# Altium PCB 风扇_V1.4.PcbDoc
Units mm, origin at the board's own origin, x right, y up, seen from the top; angles counter-clockwise.
Board outline 21 x 121 mm, 2 copper layers (Top Layer, Bottom Layer); 63 components, 46 nets, 205 pads, 114 vias.
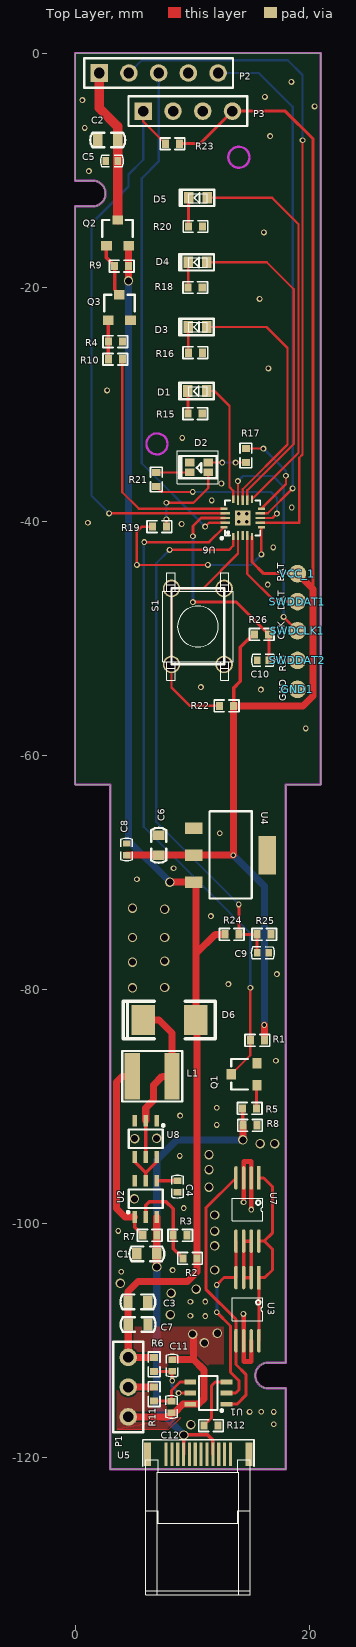
[diagram p0: Top Layer view]
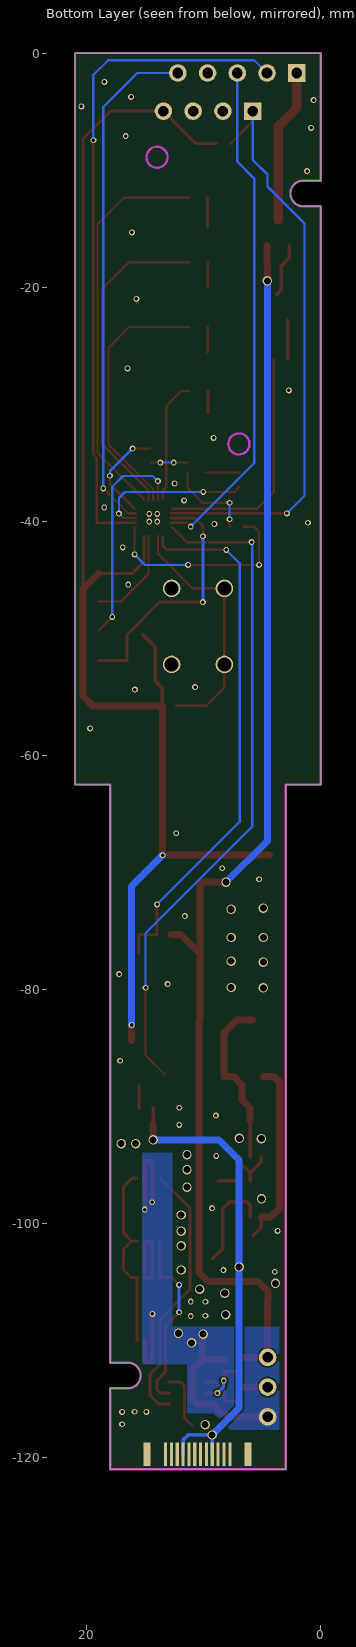
[diagram p1: Bottom Layer view, seen from below]

## Layer stack, top to bottom
Top Layer: signal copper 0.0356
Dielectric: dielectric 0.32, FR-4, Dk 4.8
Bottom Layer: signal copper 0.0356

## Board outline
0,-62.5 0,-13.1 1.5,-13.1 ccw(c1.5,-12) 1.5,-10.9 0,-10.9 0,0 21,0 21,-62.5 18,-62.5 18,-111.9 16.5,-111.9 ccw(c16.5,-113) 16.5,-114.1 18,-114.1 18,-121 3,-121 3,-62.5

## Design rules (kind name [scope] priority, off if disabled: settings)
Clearance [All] p1: gap=0.15
FabricationTestPointUsage TestPointUsage [All] p1: valid=0 allowmultiple=FALSE
FabricationTestpoint Testpoint [(IsPad And (OnTopLayer Or OnBottomLayer))] p1: side=3 testpointundercomponent=TRUE minsize=1.016 maxsize=2.54 preferedsize=1.524 minholesize=0 maxholesize=1.016 preferedholesize=0.813 testpointgrid=0.025 allowsidetop=TRUE allowsidebottom=TRUE usegrid=TRUE gridtolerance=0
PlaneConnect [All] p1: planeconnectstyle=Direct reliefexpansion=0.508 reliefentries=4 reliefconductorwidth=0.254 reliefairgap=0.254
PolygonConnect [All] p1: connectstyle=Direct reliefconductorwidth=0.254 reliefentries=4 polygonreliefangle="90 Angle"
RoutingVias [All] p1: holewidth=0.3 width=0.5 viastyle="Through Hole" minholewidth=0.3 minwidth=0.5 maxholewidth=0.711 maxwidth=1.27
SilkscreenOverComponentPads [All] p1: minsilkscreentomaskgap=0.254
SolderMaskExpansion [All] p1: expansion=0.102
Width [All] p1: maxlimit=1 minlimit=0.15 preferedwidth=0.254
24 further rules are at their usual default settings.

## Components (designator, comment, footprint, x,y, rotation, side; value= is the part's Value field where it differs from the comment)
C1 "47uF" C-0603 6.129,-102.598 r180 top
C2 "22uF" C-0603 2.794,-7.427 r0 top
C3 "47uF" C-0603 5.367,-106.713 r180 top
C4 "4.7uF" C-0402 8.748,-96.853 r270 top
C5 "1uF" C-0402 3.137,-9.225 r0 top
C6 "22uF" C-0603 7.15,-67.691 r270 top
C7 "22uF" C-0603 5.387,-108.646 r180 top
C8 "1uF" C-0402 4.402,-68.039 r270 top
C9 "1uF" C-0402 16.06,-76.881 r180 top
C10 "0.1uF" C-0402 16.06,-51.89 r0 top
C11 "1uF" C-0402 8.293,-112.141 r270 top
C12 "1uF" C-0402 8.242,-115.694 r90 top
D1 "LED0" LED-0603 9.069,-28.2 r0 top
D2 "RGB-GND" 0603*2-LED 9.794,-35.834 r0 top
D3 "LED0" LED-0603 9.094,-22.724 r0 top
D4 "LED0" LED-0603 9.095,-17.196 r0 top
D5 "LED0" LED-0603 9.129,-11.69 r0 top
D6 "SS34" DSMD 10.328,-82.619 r180 top
GND1 "TP" TP-1.5 19.002,-54.369 r90 top
L1 "10uH" L-SMD 6.584,-87.417 r180 top
P1 "Header 3H" HED1X3 4.544,-113.99 r270 top
P2 "Header 5" HDR1X5 2.06,-1.702 r0 top
P3 "Header 4" HDR1X4 5.829,-4.963 r0 top
Q1 "8050" SOT-23 13.343,-87.262 r90 top
Q2 "BM2301" SOT-23 3.635,-14.262 r0 top
Q3 "8050" SOT-23 3.787,-20.637 r0 top
R1 "10K" R-0402 15.448,-84.361 r0 top
R2 "60K" R-0402 9.954,-102.997 r180 top
R3 "10K" R-0402 8.857,-101.023 r0 top
R4 "10K" R-0402 3.564,-24.651 r180 top
R5 "1K" R-0402 14.793,-90.175 r0 top
R6 "330R" R-0402 6.756,-112.177 r90 top
R7 "60mR" R-0402 6.256,-101.021 r0 top
R8 "10K" R-0402 14.816,-91.62 r0 top
R9 "470K" R-0402 3.856,-18.199 r0 top
R10 "4.7K" R-0402 3.564,-26.162 r180 top
R11 "330R" R-0402 6.756,-114.717 r90 top
R12 "2K" R-0402 11.735,-117.279 r180 top
R15 "500R" R-0402 10.14,-30.8 r0 top
R16 "500R" R-0402 10.15,-25.603 r0 top
R17 "500R" R-0402 14.597,-34.262 r270 top
R18 "500R" R-0402 10.14,-20.03 r0 top
R19 "500R" R-0402 7.076,-40.462 r0 top
R20 "500R" R-0402 10.163,-14.821 r0 top
R21 "500R" R-0402 6.939,-36.563 r90 top
R22 "47K" R-0402 12.824,-55.783 r0 top
R23 "47K" R-0402 8.202,-7.747 r0 top
R24 "1M" R-0402 13.264,-75.301 r0 top
R25 "1M" R-0402 16.035,-75.301 r0 top
R26 "47K" R-0402 16.076,-49.677 r180 top
S1 "SW-PB" SW-6*6*4.3 10.493,-48.989 r90 top
SWDCLK1 "TP" TP-1.5 19.002,-49.362 r90 top
SWDDAT1 "TP" TP-1.5 19.002,-46.868 r90 top
SWDDAT2 "TP" TP-1.5 19.002,-51.897 r90 top
U1 "HY2120-CB" SOT-23-6L 11.384,-114.498 r90 top
U2 "HM4033" SOT-23-6L 6.04,-97.902 r0 top
U3 "8205A" TSSOP8 15.7,-104.637 r270 top
U4 "AMS1117-3.3V" SOT-223 13.289,-68.542 r270 top
U5 "USB Type-C" "USB-type C" 10.523,-119.72 r0 top
U6 "N76E003AQ20" "QFN-20 0.4mm" 14.321,-39.726 r0 top
U7 "8205A" TSSOP8 15.7,-96.118 r270 top
U8 "HM8205-6" SOT-23-6L 6.04,-92.776 r180 top
VCC_1 "TP" TP-1.5 19.002,-44.486 r90 top

## Footprints (in the part's own frame and the unit in brackets; to place one, negate y for a bottom-side part, rotate by r counter-clockwise, add the part's x,y. Pads: shape width x height; smd on the part's side, far side on the other; paste and mask are expansions set on the pad)
0603*2-LED [mm]
  rect 0.8x0.65 smd: 1(1.6,0.85) 2(1.6,0) 3(0,0) 4(0,0.85)
  silkscreen extent -0.9,-0.5 2.3,1.4
C-0402 [mm]
  rect 0.55x0.65 smd: 1(-0.5,0) 2(0.5,0)
  Top Layer pour cut-out: -0.228,0.419 -0.228,-0.419 0.229,-0.419 0.216,-0.406 0.216,0.419
  silkscreen extent -0.96,-0.5 0.99,0.5
C-0603 [mm]
  rect 0.8x1 smd: 1(-0.85,0) 2(0.85,0)
  silkscreen extent -1.49,-0.63 1.49,0.63
DSMD [mm]
  rect 2x2.54 smd: 1(0,0) 2(4.5,0)
  silkscreen extent -1.65,-1.6 6.22,1.6
HDR1X4 [mm] "Connector; Header; 4 Position"
  rect 1.5x1.5 hole 0.9: 1(0,0)
  round 1.5 hole 0.9: 2(2.54,0) 3(5.08,0) 4(7.62,0)
  silkscreen extent -1.27,-1.27 8.89,1.27
HDR1X5 [mm] "Connector; Header; 5 Position"
  rect 1.5x1.5 hole 0.9: 1(0,0)
  round 1.5 hole 0.9: 2(2.54,0) 3(5.08,0) 4(7.62,0) 5(10.16,0)
  silkscreen extent -1.27,-1.27 11.43,1.27
HED1X3 [mm]
  round 1.5 hole 0.9: 1(-2.54,0) 2(0,0) 3(2.54,0)
  silkscreen extent -3.87,-1.27 3.87,1.27
L-SMD [mm]
  rect 1.3x4 smd: 1(1.692,0.016) 2(-1.708,0.016)
  silkscreen extent -2.57,-2.14 2.56,2.17
LED-0603 [mm]
  rect 0.8x1 smd: 1(2.17,-0.68) 2(0.57,-0.68)
  silkscreen extent -0.19,-1.38 2.77,0.02
"QFN-20 0.4mm" [mm]
  rect 0.2x0.6 smd: 1(-0.8,-1.6) 5(0.8,-1.6) 11(0.8,1.6) 15(-0.8,1.6)
  rect 0.2x0.8 smd: 2(-0.4,-1.5) 3(0,-1.5) 4(0.4,-1.5) 12(0.4,1.5) 13(0,1.5) 14(-0.4,1.5)
  rect 0.6x0.2 smd: 6(1.6,-0.8) 10(1.6,0.8) 16(-1.6,0.8) 20(-1.6,-0.8)
  rect 0.8x0.2 smd: 7(1.5,-0.4) 8(1.5,0) 9(1.5,0.4) 17(-1.5,0.4) 18(-1.5,0) 19(-1.5,-0.4)
  rect 1.3x1.3 smd: 21(0,0)
  silkscreen extent -1.88,-1.82 1.5,1.5
R-0402 [mm]
  rect 0.6x0.7 smd: 1(-0.473,0) 2(0.727,0)
  Top Layer pour cut-out: -0.178,0.445 -0.178,-0.445 0.432,-0.445 0.432,0.445
  silkscreen extent -0.92,-0.5 1.18,0.5
SOT-23 [mm]
  rect 0.9x0.8 smd: 1(-0.95,-2.2) 2(0.95,-2.2) 3(0,0)
  silkscreen extent -1.3,-1.44 1.3,0
SOT-23-6L [mm]
  rect 0.4x1 smd: 1(-0.95,-1.55) 2(0,-1.55) 3(0.95,-1.55) 4(0.95,1.55) 5(0,1.55) 6(-0.95,1.55)
  silkscreen extent -1.6,-1.24 1.45,0.8
SOT-223 [mm]
  rect 1x1.5 smd: 1(-2.3,-3.15) 2(0,-3.15) 3(2.3,-3.15)
  rect 3.3x1.5 smd: ""(0,3.15)
  silkscreen extent -3.76,-1.8 3.7,1.8
SW-6*6*4.3 [mm]
  round 1.5 hole 1.2: 1(-3.25,2.25) 1(3.25,2.25) 2(-3.25,-2.25) 2(3.25,-2.25)
  silkscreen extent -3.25,-2.25 3.25,2.25
TP-1.5 [mm]
  round 1.5 smd: 1(0,0)
TSSOP8 [mm]
  rect 2x0.3 smd: 1(0,0)
  oval 2x0.3 smd: 2(0,-0.65) 3(0,-1.3) 4(0,-1.95) 5(5.4,-1.95) 6(5.4,-1.3) 7(5.4,-0.65) 8(5.4,0)
  silkscreen extent 1.74,-2.28 3.66,0.33
"USB-type C" [mm]
  rect 0.27x2 smd: 1(-2.75,0) 2(-2.25,0) 3(-1.75,0) 4(-1.25,0) 5(-0.75,0) 6(-0.25,0) 7(0.25,0) 8(0.75,0) 9(1.25,0) 10(1.75,0) 11(2.25,0) 12(2.75,0)
  rect 0.27x2 smd far side: 13(2.75,0) 14(2.25,0) 15(1.75,0) 16(1.25,0) 17(0.75,0) 18(0.25,0) 19(-0.25,0) 20(-0.75,0) 21(-1.25,0) 22(-1.75,0) 23(-2.25,0) 24(-2.75,0)
  rect 0.6x2 smd: ""(-4.32,0) ""(4.32,0)
  rect 0.6x2 smd far side: ""(-4.32,0) ""(4.32,0)
  silkscreen extent -4.73,-1.03 4.76,1.22

## Part data
C1 C2 C3 C4 C5 C6 C7 C8 C9 C10 C11 C12: library part Cap, "Capacitor"
D1 D3 D4 D5: "Typical INFRARED GaAs LED"
D6: library part "Diode 10TQ035", "Schottky Rectifier"
L1: library part Inductor, "Inductor"
P1: "Header, 3-Pin, Right Angle"
P2: "Header, 5-Pin"
P3: "Header, 4-Pin"
Q1 Q3: library part NPN, "NPN Bipolar Transistor"
Q2: library part PMOS-2, "P-Channel Power MOSFET"
R1 R2 R3 R4 R5 R6 R7 R8 R9 R10 R11 R12 R15 R16 R17 R18 R19 R20 R21 R22 R23 R24 R25 R26: library part Res1, "Resistor"
S1: "Switch"
U1: library part HY2120
U4: library part AMS1117

## Via types
v1: diameter 0.5, hole 0.3, Top Layer to Bottom Layer, tented both sides, 81 vias
v2: diameter 0.8, hole 0.6, Top Layer to Bottom Layer, tented both sides, 33 vias

## Nets (pads, with @x,y where several pads share a name; then routed paths per layer and width w, separated by ;. In a path a pad name is that pad's centre, name@x,y a point inside that pad or via, vN(x,y) a via of type N, cw(c..) or ccw(c..) an arc to the next point about the centre after c; other vN are vias at no path point)
5V: C1.1 R5.1 R7.2 R8.1 U2.3 U5.4 U5.9 U5.16 U5.21 | length 50.7
  Top Layer w0.3: U5.4 U5.4@9.273,-119.707 ; U5.4@9.286,-119.707 v2(9.286,-118.08) 11.34,-118.08 11.773,-118.514 U5.9 ; R8.1@14.32,-91.597 R5.1
  Top Layer w0.6: v2(6.98,-103.73) U2.3@6.98,-99.462 ; v2(14.33,-92.87) R8.1@14.33,-91.608
  Bottom Layer w0.3: U5.21 v2@9.273,-118.093 ; v2(9.286,-118.08) 11.34,-118.08 11.773,-118.514 U5.16
  Bottom Layer w0.6: v2(9.286,-118.08) 6.98,-115.774 v2(6.98,-103.73) 6.98,-94.58 8.69,-92.87 v2(14.33,-92.87) v2@14.13,-92.87
BAT: C3.2 C7.2 D6.1 P1.1 Q2.2 R2.1 R6.2 R9.2 R24.1 U4.3 | length 108.6
  Top Layer w0.6: C3.2 4.517,-105.823 5.38,-104.96 9.62,-104.96 10.427,-104.153 R2.1 10.427,-82.718 D6.1 10.328,-76.952 ; C7.2 C3.2@4.537,-106.733 ; C7.2@4.544,-108.653 P1.1 R6.2 ; v2(4.57,-19.46) R9.2@4.57,-18.212 ; R9.2 Q2.2@4.583,-16.464 ; v2(8.098,-70.842) U4.3 ; U4.3@10.328,-71.03 10.328,-76.952 ; R24.1 11.979,-75.301 10.328,-76.952
  Bottom Layer w0.6: v2(4.57,-19.46) 4.57,-67.314 v2(8.098,-70.842)
BAT-: C11.1 C12.1 P1.3 U1.6 U3.6 U3.7 U7.2 U7.3 | length 30.8
  Top Layer w0.4: v1@14.4,-107.75 U3.6 14.4,-111.81 15.05,-111.81 U3.7 15.05,-111.3 ; v1(14.4,-98.19) U7.3 14.4,-94.71 15.05,-94.71 U7.2 v1(15.05,-98.82)
  Top Layer w0.6: P1.3 7.906,-116.53 C12.1 8.479,-116.194 9.225,-115.448 U1.6 10.562,-115.448 11,-115.01 11,-112.51 10.131,-111.641 C11.1 ; 10.11,-111.68 v2@10.11,-109.49
  other v1: 14.39,-107.74
  other v2: 11.04,-110.21 10.05,-109.46 12.16,-109.39
BAT_ADC: C9.2 R24.2 R25.1 U6.1 | length 45.7
  Top Layer w0.2: v1(8.08,-42.45) 13.16,-42.45 13.521,-42.089 U6.1
  Top Layer w0.254: R24.2 v1@13.991,-72.741 ; R24.2@13.993,-75.303 15.56,-75.303 C9.2
  Bottom Layer w0.2: v1(8.08,-42.45) 6.94,-43.59 6.94,-65.69 v1(13.99,-72.74)
CLK: SWDCLK1.1 U6.14 | length 18.9
  Top Layer w0.2: U6.14 v1(13.921,-36.581) ; v1(17.82,-48.181) SWDCLK1.1
  Bottom Layer w0.2: v1(13.921,-36.581) 14.361,-36.14 16.91,-36.14 17.82,-37.05 v1(17.82,-48.181)
DAT: SWDDAT1.1 U6.4 | length 8.5
  Top Layer w0.2: U6.4 14.721,-44.511 17.078,-46.868 SWDDAT1.1
DRV: U2.5 U8.4 U8.6 | length 4.2
  Top Layer w0.3: U8.4 5.09,-94.72 6.04,-95.67 ; U2.5 6.04,-95.67 ; U8.6 6.99,-94.72 6.04,-95.67
FB: R2.2 R3.1 U2.2 | length 8.3
  Top Layer w0.3: U2.2 6.04,-98.45 6.35,-98.14 7.77,-98.14 8.384,-98.754 8.384,-102.154 R2.2
GND: C1.2 C2.1 C3.1 C4.2 C5.1 C6.1 C7.1 C8.1 C9.1 C10.1 D2.4 GND1.1 P2.4 P3.2 P3.3 Q1.2 Q3.2 R3.2 R4.1 R8.2 R12.1 R15.2 R16.2 R18.2 R20.2 R25.2 S1.2 U2.6 U3.2 U3.3 U4.1 U5.1 U5.12 U5.13 U5.24 U6.3 U6.21 U7.6 U7.7 U8.1 U8.3 | length 7.5
  Top Layer w0.3: U3.3 U7.6 U7.7 15.05,-103.09 U3.2 U3.3
  other v1: 16.98,-117.17 14.91,-116.11 15.91,-116.1 16.98,-116.11 11.12,-107.92 9.86,-107.89 9.86,-106.7 11.12,-106.69 3.94,-104.14 8.33,-104 3.69,-100.65 9.29,-98.7 8.94,-94.24 12.1,-91.59 8.97,-90.79 12.1,-90.12 17.16,-86.1 13.1,-79.56 17.24,-78.7 11.61,-73.75 5.28,-70.59 8.42,-69.66 12.36,-66.66 19.71,-57.7 15.88,-54.39 10.75,-54.18 16.46,-45.42 16.93,-42.24 9.1,-40.24 1.1,-40.13 13.98,-40.03 14.66,-40.03 13.98,-39.38 14.66,-39.38 18.51,-38.83 11.68,-38.22 12.5,-36.78 9.16,-32.88 2.73,-28.83 16.52,-26.94 15.76,-21 16.14,-15.32 1.18,-10.09 16.67,-7.09 0.83,-6.4 20.46,-4.56 0.62,-4.02 16.22,-3.74 18.49,-2.47
  other v2: 9.89,-117.2 8.14,-107.8 8.21,-105.96 10.35,-105.62 3.87,-105.12 11.93,-103.99 11.93,-101.92 11.93,-100.67 11.93,-99.29 5.07,-97.91 11.44,-96.91 11.44,-95.41 11.44,-94.13 15.82,-93.19 17.06,-93.19 5.09,-92.76 6.97,-92.74 4.91,-79.87 7.66,-79.85 4.91,-77.68 7.66,-77.59 4.91,-75.57 7.66,-75.57 7.66,-73.16 4.91,-73.06
IP-: C2.2 C5.2 P2.1 Q2.3 | length 13.2
  Top Layer w0.8: P2.1 2.06,-4.69 3.635,-6.265 Q2.3
KEY: R22.1 S1.1 U6.2 | length 21.7
  Top Layer w0.2: R22.1 9.823,-55.783 8.243,-54.203 8.243,-52.239 8.243,-45.739 10.95,-45.739 13.921,-42.768 U6.2
KEY_TOP: P3.1 R23.1 U6.17 | length 50.3
  Top Layer w0.2: v1(2.9,-39.33) U6.17@12.816,-39.33 ; P3.1 5.829,-5.848 R23.1
  Bottom Layer w0.2: v1(2.9,-39.33) 1.4,-37.83 1.4,-14.57 4.56,-11.41 4.56,-10.38 5.829,-9.111 P3.1
LED1: D1.1 U6.15 | length 10.6
  Top Layer w0.2: D1.1 11.92,-28.88 13.2,-30.16 13.2,-37.09 13.521,-37.411 U6.15
LED2: D3.1 U6.13 | length 22.2
  Top Layer w0.2: D3.1 16.364,-23.404 18.15,-25.19 18.15,-33.445 14.321,-37.275 U6.13
LED3: D4.1 U6.12 | length 28.1
  Top Layer w0.2: D4.1@11.271,-17.87 16.38,-17.87 18.69,-20.18 18.69,-33.4 14.721,-37.369 U6.12
LED4: D5.1 U6.11 | length 33.9
  Top Layer w0.2: D5.1 16.84,-12.37 19.09,-14.62 19.09,-34.156 U6.11
LED_B: R17.1 U6.10 | length 8.3
  Top Layer w0.2: R17.1 v1(16.09,-33.79) ; U6.10 18.02,-36.826 v1(18.02,-36.12)
  Bottom Layer w0.2: v1(16.09,-33.79) 18.02,-35.72 v1(18.02,-36.12)
LED_G: R19.1 U6.6 | length 17.8
  Top Layer w0.2: R19.1 5.718,-40.462 5.28,-40.9 v1(5.28,-43.74) v1(11.35,-43.74) ; v1@15.921,-42.839 U6.6
  Bottom Layer w0.2: v1@5.21,-43.67 v1(5.28,-43.74) ; v1(11.35,-43.74) 15.02,-43.74 v1(15.92,-42.84)
LED_R: R21.1 U6.8 | length 13.6
  Top Layer w0.2: R21.1 7.403,-37.5 v1(10.05,-37.5) ; U6.8 16.874,-39.726 v1(17.25,-39.35)
  Bottom Layer w0.2: v1(10.05,-37.5) 16.74,-37.5 17.25,-38.01 v1(17.25,-39.35)
M_CW: P2.3 U6.19 | length 43.4
  Top Layer w0.2: v1(11.11,-40.46) 11.444,-40.126 U6.19
  Bottom Layer w0.2: P2.3 7.14,-9.27 5.7,-10.71 5.7,-35.05 v1(11.11,-40.46)
M_FG: P2.2 U6.7 | length 57.5
  Top Layer w0.2: U6.7 19.156,-40.126 19.156,-34.585 19.44,-34.301 v1(19.44,-7.45)
  Bottom Layer w0.2: P2.2 5.692,-0.61 18.17,-0.61 19.44,-1.88 v1(19.44,-7.45)
M_GND: P1.2 R11.2 | length 2.2
  Top Layer w0.6: P1.2 R11.2@6.756,-113.99
M_PWM: P2.5 U6.9 | length 43.7
  Top Layer w0.2: U6.9 16.464,-39.326 v1(18.59,-37.2)
  Bottom Layer w0.2: P2.5 15.691,-1.702 18.534,-4.546 ; v1(18.59,-37.2) 18.59,-4.601
NetC4_1: C4.1 U2.4 | length 1.8
  Top Layer w0.3: U2.4 C4.1@8.746,-96.352
NetC11_2: C11.2 R6.1 U1.5 | length 4.6
  Top Layer w0.254: R6.1 8.284,-112.65 8.284,-113.414 v1(8.3,-113.43) ; v1(8.842,-114.498) U1.5
  Bottom Layer w0.254: v1(8.3,-113.43) 8.3,-113.956 v1(8.842,-114.498)
NetC12_2: C12.2 R11.1 U1.4 | length 4.3
  Top Layer w0.254: R11.1 8.238,-115.19 8.238,-114.272 8.962,-113.548 U1.4
NetD1_2: D1.2 R15.1 | length 1.9
  Top Layer w0.254: R15.1@9.639,-30.773 D1.2
NetD2_1: D2.1 R17.2 | length 3.2
  Top Layer w0.2: D2.1@11.399,-34.989 v1(12.571,-34.989) ; v1(13.711,-34.989) R17.2
  Bottom Layer w0.2: v1(12.571,-34.989) v1(13.711,-34.989)
NetD2_2: D2.2 R19.2 | length 7.5
  Top Layer w0.2: v1(7.8,-39.84) 7.803,-39.843 R19.2 ; v1(7.8,-38.42) 10.12,-38.42 11.394,-37.146 D2.2
  Bottom Layer w0.2: v1(7.8,-39.84) v1(7.8,-38.42)
NetD2_3: D2.3 R21.2 | length 2.9
  Top Layer w0.2: R21.2 D2.3@9.792,-35.836
NetD3_2: D3.2 R16.1 | length 2.2
  Top Layer w0.2: R16.1@9.664,-25.59 D3.2
NetD4_2: D4.2 R18.1 | length 2.2
  Top Layer w0.2: R18.1@9.665,-20.029 D4.2
NetD5_2: D5.2 R20.1 | length 2.4
  Top Layer w0.254: R20.1 D5.2@9.69,-12.379
NetD6_3: D6.2 L1.2 U8.2 U8.5 | length 14.9
  Top Layer w0.3: U8.5 U8.2
  Top Layer w0.6: D6.2 7.179,-82.619 8.292,-83.732 L1.2 7.453,-87.433 6.72,-88.165 6.72,-89.47 6.04,-90.15 U8.2
NetL1_1: L1.1 R7.1 U2.1 | length 16
  Top Layer w0.3: U2.1 5.09,-100.328 R7.1
  Top Layer w0.6: L1.1 4.05,-87.433 3.55,-87.933 3.55,-98.724 4.278,-99.452 U2.1
NetQ1_1: Q1.1 R5.2 | length 1.9
  Top Layer w0.254: R5.2 Q1.1@15.52,-88.234
NetQ2_1: Q2.1 Q3.3 R9.1 | length 4.6
  Top Layer w0.3: Q2.1 2.685,-17.501 R9.1 3.383,-20.233 Q3.3
NetQ3_1: Q3.1 R4.2 R10.2 | length 3.3
  Top Layer w0.3: R10.2 Q3.1
NetR12_2: R12.2 U1.3 | length 5.1
  Top Layer w0.254: R12.2 11.65,-116.637 11.65,-113.88 11.982,-113.548 U1.3
NetU3_1: U3.1 U3.8 U7.1 U7.8 | length 16.5
  Top Layer w0.254: U3.8 U3.1 16.213,-104.637 16.86,-103.99 16.86,-102.21 16.168,-101.518 ; U7.8 16.168,-101.518 ; U7.1 16.118,-96.118 16.85,-96.85 16.85,-100.835 16.168,-101.518
OC: U1.2 U3.4 U7.5 | length 15.9
  Top Layer w0.254: v1(12.11,-107.6) 13.29,-108.78 13.29,-112.72 13.99,-113.42 13.99,-114.23 13.722,-114.498 U1.2 ; v1(12.11,-105.26) 12.733,-104.637 U3.4 U7.5
  Bottom Layer w0.254: v1(12.11,-107.6) v1(12.11,-105.26)
OD: U1.1 U3.5 U7.4 | length 23
  Top Layer w0.254: U1.1 13.832,-115.448 14.59,-114.69 14.59,-112.9 13.75,-112.06 U3.5 13.75,-108.2 11.173,-105.623 11.173,-98.695 U7.4
RST: C10.2 R26.1 SWDDAT2.1 U6.18 | length 21.8
  Top Layer w0.254: v1(10.07,-46.91) 13.781,-46.91 R26.1 ; v1(10.07,-41.29) 10.07,-40.41 10.754,-39.726 U6.18 ; R26.1@16.561,-49.69 C10.2 SWDDAT2.1@18.994,-51.89
  Bottom Layer w0.254: v1(10.07,-46.91) v1(10.07,-41.29)
USB_CHECK: Q1.3 R1.1 U6.20 | length 57.2
  Top Layer w0.2: v1(5.91,-41.79) 11.456,-41.79 U6.20 ; Q1.3 14.975,-85.629 R1.1 v1(14.975,-79.865)
  Bottom Layer w0.2: v1@5.87,-41.99 5.87,-66.11 14.975,-75.215 v1(14.975,-79.865) ; v1@5.91,-41.95 v1(5.91,-41.79)
V_MOTOR: R10.1 U6.16 | length 20.6
  Top Layer w0.2: R10.1 4.037,-37.527 5.436,-38.926 U6.16
VCC_5V: C6.2 C8.2 P3.4 R1.2 R22.2 R23.2 R26.2 U4.2 U6.5 VCC_1.1 | length 122.1
  Top Layer w0.254: R23.2 10.665,-7.747 P3.4 17.963,-4.963 20.32,-7.32 20.32,-45.804 ; U6.5@15.125,-41.326 15.125,-43.48 16.13,-44.486 VCC_1.1
  Top Layer w0.3: R22.2 13.551,-54.249 14.13,-53.67 14.13,-50.78 R26.2@15.233,-49.677
  Top Layer w0.6: C8.2@4.404,-68.542 U4.2 v1(13.522,-68.542) R22.2@13.522,-55.813 ; R22.2 19.487,-55.783 20.32,-54.95 20.32,-45.804 VCC_1.1 ; v1(16.17,-83.05) 16.175,-83.055 R1.2
  Bottom Layer w0.6: v1(13.522,-68.542) 16.17,-71.19 v1(16.17,-83.05)
pads on no net: U4. U5. U5.2 U5.3 U5.5 U5.6 U5.7 U5.8 U5.10 U5.11 U5.14 U5.15 U5.17 U5.18 U5.19 U5.20 U5.22 U5.23

## Polygon pours and split planes (outlines as drawn)
BAT- on Top Layer "Bottom Layer-No Net" (solid, remove dead copper, pour order 1000): 12.7,-108.84 3.55,-108.84 3.55,-117.62 7.78,-117.62 9.18,-116.22 9.19,-116.21 11.42,-116.21 11.42,-112.02 11.44,-112.04 12.7,-112.04 12.7,-108.85
BAT- on Top Layer "Bottom Layer-No Net" (solid, remove dead copper, pour order 1000): 3.59,-117.61 8,-117.61 9.02,-116.59
BAT- on Bottom Layer "Bottom Layer-No Net" (solid, remove dead copper, pour order 1002): 12.7,-93.98 15.24,-93.98 15.24,-112.02 11.55,-112.02 11.45,-112.02 11.42,-112.02 11.42,-116.21 9.17,-116.21 9.17,-116.22 8.14,-117.25 7.77,-117.62 3.55,-117.62 3.55,-108.84 12.7,-108.84 12.7,-93.98

## Keep-outs
Keep-Out Layer:
  circle w0.2: c14,-8.9 r0.9
  circle w0.2: c7,-33.4 r0.9
  lines w0.2: 0,-62.5 3,-62.5 3,-121 18,-121 18,-114.1 16.5,-114.1 cw(c16.5,-113) 16.5,-111.9 18,-111.9 18,-62.5 21,-62.5 21,0 0,0 0,-10.9 1.5,-10.9 cw(c1.5,-12) 1.5,-13.1 0,-13.1 0,-62.5

## Other copper
Top Layer:
  pour cut-out: 12.821,-38.226 15.821,-38.226 15.821,-41.226 12.821,-41.226

## Silkscreen, mask and mechanical layers (free items; w line width, h text height)
Top Overlay:
  circle w0.05: c10.5,-49 r1.75
  lines w0.05: 6.03,-131.38 14.97,-131.38 ; 6.03,-124.57 7.1,-124.57 7.1,-125.62 ; 7.03,-131.75 7.03,-121.25 13.97,-121.25 13.97,-131.75 ; 7.03,-125.62 13.97,-125.62 ; 7.1,-121.25 7.1,-120.2 6.03,-120.2 6.03,-131.75 14.97,-131.75 14.97,-120.2 ; 7.85,-52.575 8.55,-52.575 ; 7.85,-52.025 7.85,-53.575 8.55,-53.575 8.55,-52.025 ; 7.85,-45.975 7.85,-44.425 8.55,-44.425 8.55,-45.975 ; 7.85,-45.425 8.55,-45.425 ; 12.45,-52.575 13.15,-52.575 ; 12.45,-52.025 12.45,-53.575 13.15,-53.575 13.15,-52.025 ; 12.45,-45.975 12.45,-44.425 13.15,-44.425 13.15,-45.975 ; 12.45,-45.425 13.15,-45.425 ; 13.9,-125.62 13.9,-124.57 14.97,-124.57 ; 13.9,-121.25 13.9,-120.2 14.97,-120.2 ; 7.475,-52.025 7.475,-45.975 13.525,-45.975 13.525,-52.025 7.475,-52.025 ; 8.75,-36.8 12.25,-36.8 12.25,-34 8.75,-34 8.75,-36.8 ; 9.7,-29.3 11.3,-29.3 11.3,-28.5 9.7,-28.5 9.7,-29.3 ; 9.7,-23.8 11.3,-23.8 11.3,-23 9.7,-23 9.7,-23.8 ; 9.7,-18.3 11.3,-18.3 11.3,-17.5 9.7,-17.5 9.7,-18.3 ; 9.7,-12.8 11.3,-12.8 11.3,-12 9.7,-12 9.7,-12.8
  text "BAT" at 17.88,-45.19 h0.6 r90
  text "DAT" at 17.91,-47.63 h0.6 r90
  text "CLK" at 17.91,-50.13 h0.6 r90
  text "RST" at 18.05,-52.86 h0.6 r90
  text "GND" at 18.03,-55.4 h0.6 r90
Mechanical 2:
  lines w0.05: 3,-5.75 3,-0.25 9.6,-0.25 9.6,-5.75 3,-5.75 ; 11.4,-5.75 18,-5.75 18,-0.25 11.4,-0.25 11.4,-5.75

## Dimensions
0,0 to 3,-121 on Keep-Out Layer
0,0 to 21,0 on Keep-Out Layer